# EAGLE board Threeno Tx Rev1 (EAGLE 9.6.2)
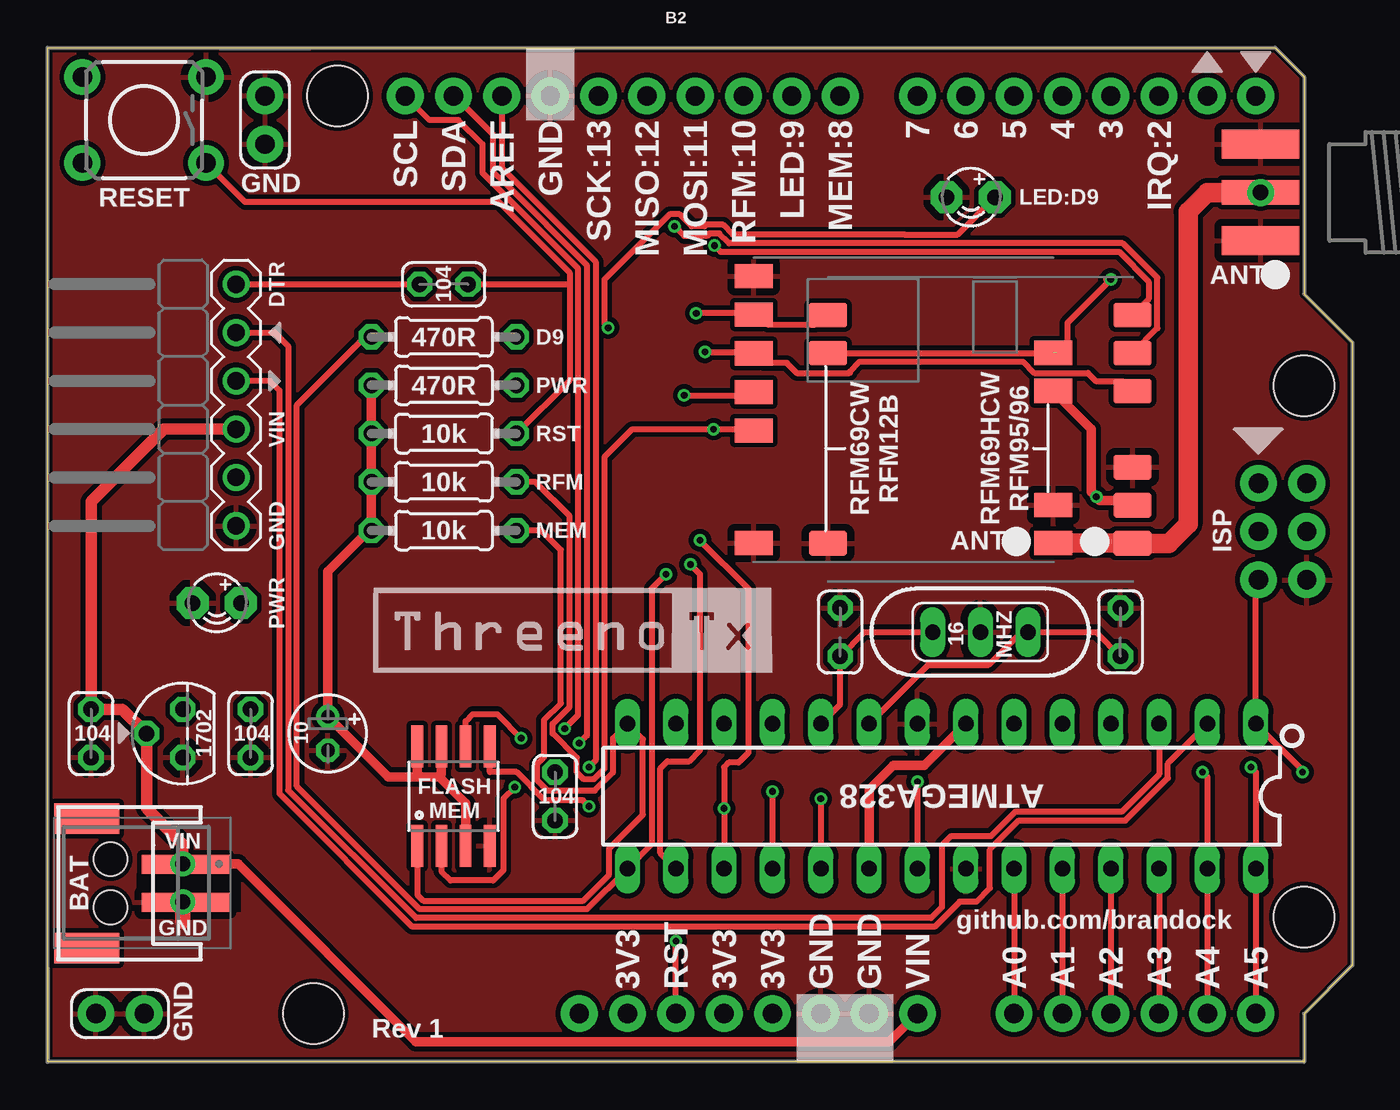
[diagram p0: board, top side]
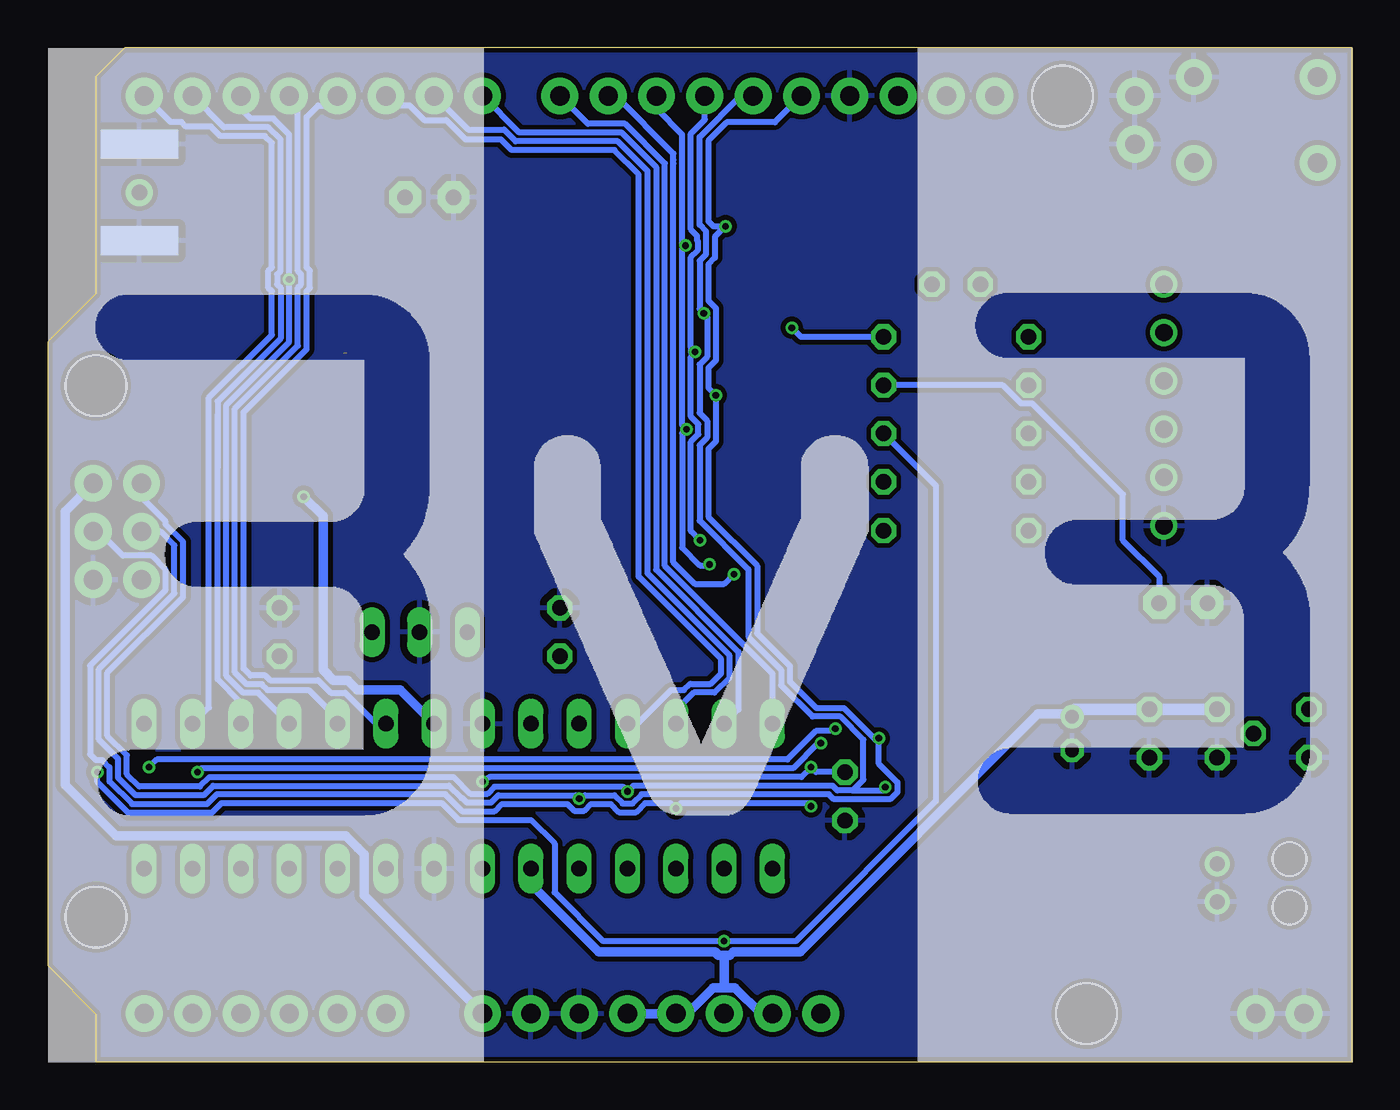
[diagram p1: board, bottom side, seen from below]

Size 68.58 x 53.34 mm. Coordinates in mm from the lower left corner, seen from the top.
Outline: 0,53.34 64.52,53.34 66.04,51.82 66.04,40.39 68.58,37.85 68.58,5.08 66.04,2.54 66.04,0 0,0 0,53.34
Copper layers (1*16): Top 0.035mm / dielectric 1.5mm / Bottom 0.035mm
Design rules "ITEADstudio_DRC *": minimum track width 6mil, minimum drill 12mil, track to track 6mil, track to pad 6mil, pad to pad 6mil, via to via 6mil, smd to smd 0mil, copper to edge 10mil, drill to drill 10mil, minimum pad ring 10mil, minimum via ring 6mil, stop-mask expansion 2mil, vias tented up to drill 100mil, thermal gap 15mil
Net classes: 1 power: width 0.381 mm, clearance 0.254 mm
Holes 1.78 mm at 3.3,10.67 3.3,8.13
tRestrict: area 9.6,7.9 to 10.2,8.9; area 5,8.9 to 10.2,9.9; area 4.7,9.2 to 5,9.9

## Footprints (pad centres in the part's own frame; a part is rotated, then mirrored left to right if it is on the bottom)
THREENO_TX_BOARD = drill 1.016 pad 1.93: 3.3V 2.54,-24.13; 3.3V@2 5.08,-24.13; A0 17.78,-24.13; A1 20.32,-24.13; A2 22.86,-24.13; A3 25.4,-24.13; A4 27.94,-24.13; A5 30.48,-24.13; AREF -9.144,24.13; D0 30.48,24.13; D1 27.94,24.13; D2 25.4,24.13; D3 22.86,24.13; D4 20.32,24.13; D5 17.78,24.13; D6 15.24,24.13; D7 12.7,24.13; D8 8.636,24.13; D9 6.096,24.13; D10 3.556,24.13; D11 1.016,24.13; D12 -1.524,24.13; D13 -4.064,24.13; GND@1 7.62,-24.13; GND@2 10.16,-24.13; GND@3 -6.604,24.13; GND@ICSP 33.16,-1.32; IOREF -2.54,-24.13; MISO@ICSP 30.62,3.76; MOSI@ICSP 33.16,1.22; NC -5.08,-24.13; RESET@1 0,-24.13; RESET@ICSP 30.62,-1.32; SCK@ICSP 30.62,1.22; SCL -14.224,24.13; SDA -11.684,24.13; VIN 12.7,-24.13; VIN@ICSP 33.16,3.76 | hole 3.175: -17.78,24.13; 33.02,8.89; 33.02,-19.05; -19.05,-24.13
C025-024X044-NO-MIDDLE-SILK = drill 0.813 octagon: 1 -1.27,0; 2 1.27,0
E1,8-4 = drill 0.711 pad 1.168: + -0.889,0 | drill 0.711 pad 1.168 octagon: - 0.889,0
JST-2-SMD = smd 1 x 4.6: 1 -1,-3.7; 2 1,-3.7 | smd 1.6 x 3.4: NC1 -3.4,1.5; NC2 3.4,1.5
S2BPHKS = drill 0.8 pad 1.3: 1 0,0; 2 -2,0
FTDI_ROUND_HEADER_SILK = drill 0.914: 1 -2.54,-1.27; 2 0,-1.27; 3 2.54,-1.27; 4 5.08,-1.27; 5 7.62,-1.27; 6 10.16,-1.27
SMA_EDGELAUNCH = smd 4.064 x 1.524: GND@1 2.032,-2.54; GND@2 2.032,2.54 | smd 4.064 x 1.524 bottom: GND@3 2.032,2.54; GND@4 2.032,-2.54 | smd 4.064 x 1.27: P 2.032,0
RFM12B-ANTENNA = drill 0.8 pad 1.422: P$1 0,0
ALLIGATORCLIP-WIRELOOP = drill 1.016 pad 1.93: P$1 -2.54,0; P$2 0,0
LED3MM-BRANDOCK = drill 0.813 pad 1.676 octagon: A -1.27,0; K 1.27,0
0204/7 = drill 0.813 octagon: 1 -3.81,0; 2 3.81,0
RFM12B-MINPADS = smd 2 x 1.27: ANT 8,-6; GND 8,-2; GND2 -8.002,-6.001; IRQ -8,4; SCK 8,4; SDI 8,2; SDO -8,6; SEL 8,6; VDD 8,-4
RFM95_LONGER = smd 2 x 1.27: 3.3V 7.651,1; ANT 7.651,-7; DIO0 7.651,3; GND 7.651,-5; GND1 -8.107,-7; GND2 -8.107,7.032; MISO -8.107,5; MOSI -8.107,2.968; NSS -8.107,-1.096; SCK -8.107,0.936
TACTILE_SWITCH_PTH_6.0MM = drill 1.016 pad 1.88: 1 -3.251,2.261; 2 3.251,2.261; 3 -3.251,-2.261; 4 3.251,-2.261
DIP28-OVALPADS = drill 0.813 long: 1 -16.51,-3.81; 2 -13.97,-3.81; 3 -11.43,-3.81; 4 -8.89,-3.81; 5 -6.35,-3.81; 6 -3.81,-3.81; 7 -1.27,-3.81; 8 1.27,-3.81; 9 3.81,-3.81; 10 6.35,-3.81; 11 8.89,-3.81; 12 11.43,-3.81; 13 13.97,-3.81; 14 16.51,-3.81; 15 16.51,3.81; 16 13.97,3.81; 17 11.43,3.81; 18 8.89,3.81; 19 6.35,3.81; 20 3.81,3.81; 21 1.27,3.81; 22 -1.27,3.81; 23 -3.81,3.81; 24 -6.35,3.81; 25 -8.89,3.81; 26 -11.43,3.81; 27 -13.97,3.81; 28 -16.51,3.81
JEELABS_TO92 = drill 0.813 octagon: 1 -1.27,0; 2 0,1.905; 3 1.27,0
SO08 = smd 0.61 x 2.21: 1_CS -1.905,-2.616; 2_SO -0.635,-2.616; 3_WP 0.635,-2.616; 4_GND 1.905,-2.616; 5_SI 1.905,2.616; 6_SCK 0.635,2.616; 7_HOLD -0.635,2.616; 8_VCC -1.905,2.616
HC49US-OR-RESONATOR = drill 0.813 long: 1 -2.5,0; 2 0,0; 3 2.5,0

## Placement (x,y rotation side)
B1  3VTHREENO_BOTTOM_SILK  [3VTHREENO_BOTTOM_SILK]  33.02,26.67 0 top
B2  THREENO_TX_BOARD3VTHREENO  [THREENO_TX_BOARD]  33.02,26.67 0 top
B3  3VTHREENO_LOGO  [3VTHREENO_LOGO]  27.28,22.63 0 top
C1  18pf  [C025-024X044-NO-MIDDLE-SILK]  56.39,22.61 90 top
C2  18pf  [C025-024X044-NO-MIDDLE-SILK]  41.66,22.61 90 top
C3  .1uF  [C025-024X044-NO-MIDDLE-SILK]  2.29,17.27 270 top
C4  .1uF  [C025-024X044-NO-MIDDLE-SILK]  10.67,17.27 270 top
C5  10uF  [E1,8-4]  14.73,17.27 270 top
C6  .1uF  [C025-024X044-NO-MIDDLE-SILK]  26.67,13.97 270 top
C7  .1uF  [C025-024X044-NO-MIDDLE-SILK]  20.83,40.89 0 top
J1  JST-PH-SMD  [JST-2-SMD]  3.56,9.4 90 top
J2  S2B-PH-K-S  [S2BPHKS]  7.11,10.41 90 top
J3  FTDI  [FTDI_ROUND_HEADER_SILK]  8.64,30.73 90 top
J4  SMA_EDGE  [SMA_EDGELAUNCH]  65.79,45.72 180 top
J5  RFM12B_ANTENNA  [RFM12B-ANTENNA]  63.75,45.72 0 top
J6  ALLIGATORCLIP-WIRELOOP  [ALLIGATORCLIP-WIRELOOP]  2.54,2.54 180 top
J7  ALLIGATORCLIP-WIRELOOP  [ALLIGATORCLIP-WIRELOOP]  11.43,50.8 90 top
LED1  LED  [LED3MM-BRANDOCK]  48.51,45.47 180 top
LED2  LED  [LED3MM-BRANDOCK]  8.89,24.13 180 top
R1  470R  [0204/7]  20.83,38.13 180 top
R2  470R  [0204/7]  20.83,35.59 180 top
R3  10k  [0204/7]  20.83,33.05 0 top
R4  10k  [0204/7]  20.83,30.51 180 top
R5  10k  [0204/7]  20.83,27.94 180 top
RF1  RFM12B_MINPADS  [RFM12B-MINPADS]  49.02,33.27 0 top
RF2  RFM95LONGER  [RFM95_LONGER]  45.21,34.29 0 top
SW1  MOMENTARY-SWITCH-SPST-PTH-6.0MM  [TACTILE_SWITCH_PTH_6.0MM]  5.08,49.53 180 top
U1  328P  [DIP28-OVALPADS]  46.99,13.97 180 top
U2  JEELABS_MCP1702Z  [JEELABS_TO92]  7.11,17.27 90 top
U3  AT25F512BJEDEC_3.9MM  [SO08]  21.34,13.97 0 top
Y1  16Mhz  [HC49US-OR-RESONATOR]  49.02,22.61 180 top

## Library data of the parts
B1-B3 = 3VThreeno
C1-C4 C6 C7 = rcl-brandock
C5 = rcl; SPICEPREFIX: C
J1 = SparkFun-Connectors; PROD_ID: CONN-11443; SF_ID: PRT-08612
J2 = JST PH Thru Hole S2B-PH-K-S; DESCRIPTION: CONN HEADER R/A 2POS 2MM; HEIGHT: 4.8mm; MANUFACTURER_NAME: JST (JAPAN SOLDERLESS TERMINALS); MANUFACTURER_PART_NUMBER: S2B-PH-K-S
J3 = FTDI
J4 LED1 LED2 = adafruit
J5 = LowPowerLab
J6 J7 = Alligator Clip
R1-R5 = rcl; SPICEPREFIX: R
RF1 RF2 = RFM_MiniPads
SW1 = SparkFun-Switches; PROD_ID: SWCH-08441; SF_SKU: COM-00097
U1 = SparkFun-IC-Microcontroller; PROD_ID: IC-09136
U2 = JeeLib; LDO: MCP1702
U3 = Moteino-Parts; FLASH_MEM: W25XX40CLSNIG-ND
Y1 = SparkFun-Clocks-Brandock

## Nets
A0: B2.A0 U1.23
A1: B2.A1 U1.24
A2: B2.A2 U1.25
A3: B2.A3 U1.26
A4_SDA: B2.A4 B2.SDA U1.27
A5_SCL: B2.A5 B2.SCL U1.28
AREF: B2.AREF C6.1 U1.21
D0_RX: B2.D0 J3.4 U1.2
D1_TX: B2.D1 J3.5 U1.3
D2: B2.D2 RF1.IRQ RF2.DIO0 U1.4
D3: B2.D3 U1.5
D4: B2.D4 U1.6
D5: B2.D5 U1.11
D6: B2.D6 U1.12
D7: B2.D7 U1.13
D8_CS_FLASH: B2.D8 R5.1 U1.14 U3.1_CS
D9: B2.D9 R1.2 U1.15
D10_CS_RFM: B2.D10 R4.1 RF1.SEL RF2.NSS U1.16
D11_MOSI: B2.D11 B2.MOSI@ICSP RF1.SDI RF2.MOSI U1.17 U3.5_SI
D12_MISO: B2.D12 B2.MISO@ICSP RF1.SDO RF2.MISO U1.18 U3.2_SO
D13_SCK: B2.D13 B2.SCK@ICSP RF1.SCK RF2.SCK U1.19 U3.6_SCK
DTR: C7.1 J3.6
GND [power]: B2.GND@1 B2.GND@2 B2.GND@3 B2.GND@ICSP C1.2 C2.2 C3.2 C4.2 C5.- C6.2 J1.1 J2.2 J3.1 J4.GND@1 J4.GND@2 J4.GND@3 J4.GND@4 J6.P$1 J6.P$2 J7.P$1 J7.P$2 LED1.K LED2.K RF1.GND RF1.GND2 RF2.GND RF2.GND1 RF2.GND2 SW1.3 U1.8 U1.22 U2.1 U3.4_GND Y1.2
N$2: LED2.A R2.1
N$3: J4.P J5.P$1 RF1.ANT RF2.ANT
N$14: LED1.A R1.1
RST: B2.RESET@1 B2.RESET@ICSP C7.2 R3.2 SW1.1 U1.1
VCC: B2.3.3V B2.3.3V@2 B2.IOREF C4.1 C5.+ R2.2 R3.1 R4.2 R5.2 RF1.VDD RF2.3.3V U1.7 U1.20 U2.3 U3.3_WP U3.7_HOLD U3.8_VCC
VIN: B2.VIN B2.VIN@ICSP C3.1 J1.2 J2.1 J3.3 U2.2
XTL1: C1.1 U1.9 Y1.1
XTL2: C2.1 U1.10 Y1.3

## Tracks (layer width: path | path; a pad name or v marks a point on that pad's centre or on a via)
A0
  Top 0.305: U1.23 B2.A0
A1
  Top 0.305: U1.24 B2.A1
A2
  Top 0.305: U1.25 B2.A2
A3
  Top 0.305: U1.26 B2.A3
A4_SDA  (via drill 0.35)
  Top 0.305: B2.A4 U1.27 60.96,14.99 v60.71,15.24 | v27.94,16.76 28.35,17.17 28.35,41.9 24.07,46.17 23.42,46.82 23.42,48.77 21.39,50.8 B2.SDA
  Bottom 0.305: v27.94,16.76 28.07,16.76 29.39,15.44 60.5,15.44 v60.71,15.24
A5_SCL  (via drill 0.35)
  Top 0.305: B2.A5 U1.28 63.5,15.24 v63.25,15.49 | v27.18,17.53 27.89,18.24 27.89,41.71 22.86,46.74 22.86,48.26 21.59,49.53 20.07,49.53 B2.SCL
  Bottom 0.305: v27.18,17.53 27.31,17.4 28.2,17.4 29.7,15.9 62.84,15.9 v63.25,15.49
AREF  (via drill 0.35)
  Top 0.305: B2.AREF 23.88,47.01 28.8,42.09 28.8,15.85 v28.45,15.49 | v45.72,14.73 U1.21
  Bottom 0.305: C6.1 28.19,15.24 v28.45,15.49 28.96,14.99 45.34,14.99 v45.72,14.73
D0_RX
  Top 0.305: J3.4 11.68,35.81 12.19,35.31 12.19,14.1 19.18,7.11 46.62,7.11 47.94,8.43 48.82,8.43 49.53,9.14 49.53,11.18 51.05,12.7 56.64,12.7 58.88,14.94 58.88,15.7 U1.2
  Bottom 0.305: B2.D0 62.13,49.43 61.55,49.43 61.32,49.19 60,49.19 59.5,48.69 57.16,48.69 56.79,48.32 56.79,41.77 56.97,41.6 56.97,40.7 56.79,40.52 56.79,38.23 60.1,34.92 60.1,18.64 U1.2
D1_TX
  Top 0.305: U1.3 58.42,15.12 56.45,13.16 50.86,13.16 49.59,11.89 47.5,11.89 47.02,11.4 47.02,8.16 46.43,7.57 19.37,7.57 12.65,14.29 12.65,37.64 11.94,38.35 J3.5
  Bottom 0.305: 59.65,21.84 59.65,31.24 | 59.65,31.24 59.65,34.04 | B2.D1 59.31,49.15 56.97,49.15 56.34,48.51 56.34,41.59 56.51,41.41 56.51,40.89 56.34,40.71 56.34,38.04 59.65,34.73 59.65,31.24 | 59.65,31.24 | U1.3 58.42,18.89 59.65,20.11 59.65,21.84 | 59.65,21.84
D2  (via drill 0.35)  (1 unrouted)
  Top 0.305: RF1.IRQ 52.85,37.27 RF2.DIO0 | 55.63,41.15 v55.88,41.15 53.59,38.86 53.59,37.85 53.02,37.27
  Bottom 0.305: U1.4 57.51,19.41 58.29,19.41 59.19,20.3 59.19,34.54 55.88,37.85 v55.88,41.15 55.88,48.77 56.72,49.61 57.91,49.61 58.42,50.11 B2.D2
D3
  Bottom 0.305: B2.D3 55.42,50.34 55.42,41.59 55.25,41.41 55.25,40.89 55.42,40.71 55.42,37.66 58.73,34.35 58.73,20.49 58.1,19.86 57.32,19.86 57.01,19.56 54.86,19.56 53.34,18.03 U1.5
D4
  Bottom 0.305: U1.6 51.31,17.78 52.94,19.41 53.7,19.41 54.36,20.07 56.87,20.07 57.13,20.32 57.91,20.32 58.27,20.68 58.27,34.16 54.97,37.47 54.97,40.52 54.79,40.7 54.79,41.6 54.97,41.77 54.97,49.68 54.36,50.29 53.85,50.29 B2.D4
D5
  Bottom 0.305: 38.07,17.81 U1.11 37.59,17.78 35.81,19.55 35.13,19.55 34.8,19.89 33.72,19.89 33.18,20.42 33.18,21.18 37.52,25.52 37.52,46.68 38.79,47.95 44.2,47.95 44.76,48.51 46.62,48.51 47.64,49.53 48.79,49.53 49.55,50.29 50.29,50.29 B2.D5
D6
  Bottom 0.305: U1.12 35.56,18.48 34.61,19.43 33.53,19.43 32.73,20.23 32.73,21.37 37.06,25.7 37.06,46.87 38.6,48.41 43.98,48.41 44.59,49.02 46.48,49.02 B2.D6
D7
  Bottom 0.305: B2.D7 43.79,48.87 38.41,48.87 36.6,47.05 36.6,25.89 32.27,21.56 32.27,18.53 U1.13
D8_CS_FLASH
  Top 0.305: U3.1_CS 19.43,8.8 19.75,8.48 28.16,8.48 29.52,9.84 29.52,11.22 31.29,13 31.29,16.97 U1.14 29.72,17.02 29.72,15.22 28.77,14.27 26.27,14.27 25.71,14.84 25.71,15.64 26.09,16.02 26.09,17.98 26.98,18.86 26.98,26.92 25.96,27.94 R5.1
  Bottom 0.305: U1.14 30.48,20.42 36.14,26.08 36.14,47.24 38.22,49.32 40.18,49.32 B2.D8
D9  (via drill 0.35)
  Top 0.305: v32.51,25.65 31.75,24.89 31.75,11.43 U1.15 28.35,8.03 19.56,8.03 13.11,14.48 13.11,34.54 16.55,37.99 16.88,37.99 R1.2
  Bottom 0.305: v32.51,25.65 33.02,25.15 34.56,25.15 35.68,26.27 35.68,47.24 | 35.68,47.24 35.68,47.76 38.72,50.8 B2.D9 | 35.68,47.24 | 35.68,47.24 35.68,47.43
D10_CS_RFM  (via drill 0.35)
  Top 0.305: v33.78,26.16 34.29,25.65 34.29,16.39 33.71,15.82 32.58,15.82 32.21,15.44 32.21,10.97 U1.16 | RF2.NSS 37.02,33.27 v35,33.27 30.73,33.27 29.26,31.8 29.26,15.41 28.71,14.86 28.19,14.86 27.82,15.23 27.82,15.99 26.55,17.26 26.55,17.79 27.43,18.67 27.43,28.7 25.63,30.51 R4.1 | v35.05,42.93 35.38,42.6 56.31,42.6 57.87,41.04 57.87,40.12 RF1.SEL
  Bottom 0.305: v33.78,26.16 33.83,26.11 34.29,26.11 35.23,27.05 35.23,33.05 v35,33.27 35.23,33.5 35.23,42.75 35.1,42.88 35.23,43.01 | 35.23,43.01 35.23,48.77 36.58,50.12 B2.D10 | v35.05,42.93 35.13,43.01 35.23,43.01
D11_MOSI  (via drill 0.35)
  Top 0.305: v34.29,27.43 36.83,24.89 36.83,16.26 36.32,15.75 35.81,15.75 35.56,15.49 v35.56,13.34 U1.17 | v34.55,37.34 37.02,37.34 RF2.MOSI 37.61,36.75 38.85,36.75 39.37,36.23 42.16,36.23 42.16,36.31 42.67,36.82 51.27,36.82 51.86,36.23 54.67,36.23 55.12,35.78 56.51,35.78 RF1.SDI | U3.5_SI 23.24,15.24 24.66,15.24 26.13,13.77 28.13,13.77 v28.46,13.44 v28.45,13.44
  Bottom 0.305: B2.D11 34.04,49.55 34.77,48.82 34.77,43.77 34.43,43.43 34.43,43.2 34.42,43.19 34.42,42.66 34.77,42.31 34.77,37.56 | B2.MOSI@ICSP 65.89,27.89 64.62,26.62 63.11,26.62 62.37,25.88 62.37,24.82 66.34,20.85 66.34,16.18 66.04,15.87 65.7,15.87 65.33,15.5 65.33,14.75 64.14,13.56 60.19,13.56 59.69,14.07 47.67,14.07 46.79,13.19 45.08,13.19 44.7,13.56 41.25,13.56 40.9,13.21 40.38,13.21 40.02,13.56 38.98,13.56 38.55,13.13 37.65,13.13 37.17,13.61 35.84,13.61 v35.56,13.34 35.28,13.61 28.45,13.61 v28.45,13.44 | 34.77,37.56 34.77,37.31 | v34.29,27.43 34.77,27.91 34.77,32.62 34.37,33.01 34.37,33.54 34.77,33.93 34.77,37.08 34.55,37.31 v34.55,37.34 34.77,37.56
D12_MISO  (via drill 0.35)
  Top 0.305: RF1.SDO 40.93,39.37 40.34,38.78 37.85,38.78 37.34,39.29 RF2.MISO 37.02,39.37 v34.09,39.37 | v38.1,14.22 U1.18 | U3.2_SO 20.7,10.03 21.19,9.55 23.42,9.55 23.95,10.08 23.95,13.85 v24.55,14.45
  Bottom 0.305: B2.MISO@ICSP 63.64,29.69 62.37,28.42 62.37,28.27 61.46,27.35 61.46,24.45 65.43,20.47 65.43,17.15 64.41,16.13 64.41,15.13 63.76,14.48 60.57,14.48 60.07,14.99 47.24,14.99 46.36,14.1 45.46,14.1 45.08,14.48 38.35,14.48 v38.1,14.22 37.79,14.53 27.32,14.53 27.07,14.27 26.27,14.27 | 26.27,14.27 25.71,14.84 25.71,16.95 26.92,18.16 28.37,18.16 30.02,19.81 30.02,20.62 31.75,22.35 31.75,25.91 34.31,28.47 34.31,32.43 33.92,32.82 33.92,33.73 34.31,34.12 34.31,36.68 33.92,37.08 33.92,39.2 v34.09,39.37 34.31,39.59 34.31,42.12 33.96,42.48 33.96,43.67 34.31,44.02 34.31,48.63 32.14,50.8 B2.D12 | 26.27,14.27 24.63,14.27 24.55,14.35 v24.55,14.45
D13_SCK  (via drill 0.35)
  Top 0.305: RF2.SCK 37.28,35.05 v33.46,35.05 | RF1.SCK 58.33,38.58 58.33,41.23 56.5,43.05 35.82,43.05 35.31,43.56 34.79,43.56 34.67,43.43 33.46,43.43 v32.95,43.94 | v40.64,13.84 U1.19 | 21.84,16.71 U3.6_SCK 21.97,17.91 22.35,18.29 23.62,18.29 v24.89,17.02
  Bottom 0.305: B2.SCK@ICSP 62.64,27.89 61.91,27.17 61.91,24.63 65.89,20.66 65.89,16.96 64.87,15.95 64.87,14.94 63.95,14.02 60.38,14.02 59.88,14.53 47.48,14.53 46.83,13.88 46.78,13.88 46.55,13.64 45.27,13.64 44.89,14.02 40.82,14.02 v40.64,13.84 40.51,13.84 40.34,14.02 38.79,14.02 38.36,13.59 37.84,13.59 37.36,14.07 27.51,14.07 27.26,13.82 24.29,13.82 23.92,14.19 23.92,14.71 24.89,15.68 24.89,16.78 25.13,17.02 | 25.13,17.02 v24.89,17.02 | 25.13,17.02 26.73,18.62 28.18,18.62 29.57,20 29.57,20.81 31.29,22.54 31.29,26.1 33.85,28.66 33.85,32.24 33.46,32.63 33.46,33.02 | 33.46,33.02 v33.46,35.05 33.85,35.45 33.85,36.49 33.46,36.89 33.46,39.63 33.85,40.03 33.85,41.93 33.5,42.29 33.5,43.39 v32.95,43.94 33.59,43.94 33.85,44.21 33.85,48.44 32.89,49.4 30.35,49.4 B2.D13 | 33.46,33.02
DTR
  Top 0.305: J3.6 C7.1
GND
  Top 0.813: 7.11,7.4 J2.2
  pour Top: -7.87,54.61 74.93,54.61 74.93,-1.27 -7.87,-1.27
  pour Bottom: -7.87,54.61 74.93,54.61 74.93,-1.27 -7.87,-1.27
N$2
  Bottom 0.305: LED2.A 10.16,25.53 12.06,27.43 12.06,29.84 16.84,34.62 17.42,34.62 18.38,35.59 R2.1
N$3
  Top 1.016: RF2.ANT 57.01,27.29 RF1.ANT 58.93,27.27 59.94,28.29 59.94,44.7 60.96,45.72 J4.P
N$14  (via drill 0.35)
  Top 0.305: v29.46,38.61 29.26,38.81 29.26,41.15 32.69,44.57 33.21,44.57 33.84,43.94 34.53,43.94 34.6,44.01 35.5,44.01 36.01,43.51 44.96,43.51 45.04,43.51 47.83,43.51 LED1.A
  Bottom 0.305: 24.66,38.1 R1.1 28.98,38.12 v29.46,38.61
RST  (via drill 0.35)
  Top 0.305: 27.43,40.89 27.43,41.52 23.74,45.21 10.39,45.21 SW1.1 | 27.43,40.89 27.43,35.84 R3.2 | B2.RESET@1 v33.02,6.35 | B2.RESET@ICSP 63.46,25.17 63.46,17.82 U1.1 65.96,15.32 v65.96,15.24 | C7.2 27.43,40.89
  Bottom 0.305: v65.96,15.24 65.96,14.74 64.33,13.11 59.94,13.11 59.44,13.61 47.86,13.61 46.98,12.73 43.18,12.73 41.93,11.48 41.93,8.91 39.37,6.35 v33.02,6.35 29.26,6.35 21.89,13.72 21.89,30.3 R3.2
VCC  (via drill 0.35)
  Top 0.406: R5.2 16.89,27.94 | 19.3,14.99 19.43,15.11 | 20.57,14.99 20.7,15.11
  Top 0.508: U1.7 46.08,15.6 44.45,15.6 43.18,14.33 U1.20 43.18,12.95 | RF1.VDD 56.77,29.53 55.31,29.53 v55.12,29.72 54.86,29.97 54.86,33.29 RF2.3.3V | 16.89,27.94 14.73,25.78 C5.+ 17.91,14.99 19.3,14.99 20.57,14.99 21.97,13.59 U3.3_WP | R5.2 R4.2 R3.1 R2.2 | 19.43,15.11 U3.8_VCC | 20.7,15.11 U3.7_HOLD
  Bottom 0.305: C5.+ 14.73,18.54
  Bottom 0.508: B2.3.3V@2 B2.3.3V 34.96,2.54 33.59,3.91 33.02,3.91 | 33.02,3.91 32.45,3.91 31.08,2.54 B2.IOREF | C5.+ 14.86,18.29 16.53,18.29 29.03,5.79 32.54,5.79 32.72,5.62 33.02,5.62 | 33.02,5.62 33.32,5.62 33.5,5.79 39.6,5.79 43.18,9.37 U1.20 | 33.02,5.62 33.02,3.91 | U1.7 50.04,19.56 52.3,19.56 52.81,20.07 53.57,20.07 54.1,20.6 54.1,28.7 v55.12,29.72
  Bottom 0.61: U2.3 C4.1 14.6,18.54 14.86,18.29
VIN
  Top 0.508: 9.13,10.16 8.89,10.4 J1.2 7.13,10.4 J2.1 10.01,10.41 19.36,1.07 44.25,1.07 B2.VIN
  Top 0.61: J3.3 6.1,33.27 2.29,29.46 C3.1 3.94,18.54 U2.2 5.21,13.34 7.11,11.43 J2.1
  Bottom 0.508: B2.VIN 51.94,8.76 51.94,10.92 52.27,11.25 52.27,11.26 52.9,11.89 64.97,11.89 67.65,14.57 67.65,28.96 B2.VIN@ICSP
XTL1
  Top 0.305: U1.9 46.28,20.88 49.46,20.88 51.19,22.61 Y1.1 55.12,22.61 C1.1
XTL2
  Top 0.305: U1.10 41.66,18.8 C2.1 42.93,22.61 Y1.3

## Text on the board
tPlace: RESET | GND | LED:D9 | ANT | DTR | 104 | 470R | D9 | 470R | PWR | VIN | 10k | RST | RFM69CW / RFM12B | RFM69HCW / RFM95/96 | 10k | RFM | GND | 10k | MEM | ANT | ISP | PWR | 16 | MHZ | 10 | 104 | 1702 | 104 | FLASH | 104 | ATMEGA328 | MEM | VIN | BAT | GND | GND
tNames: github.com/brandock | Rev 1